# Allegro board divider.brd
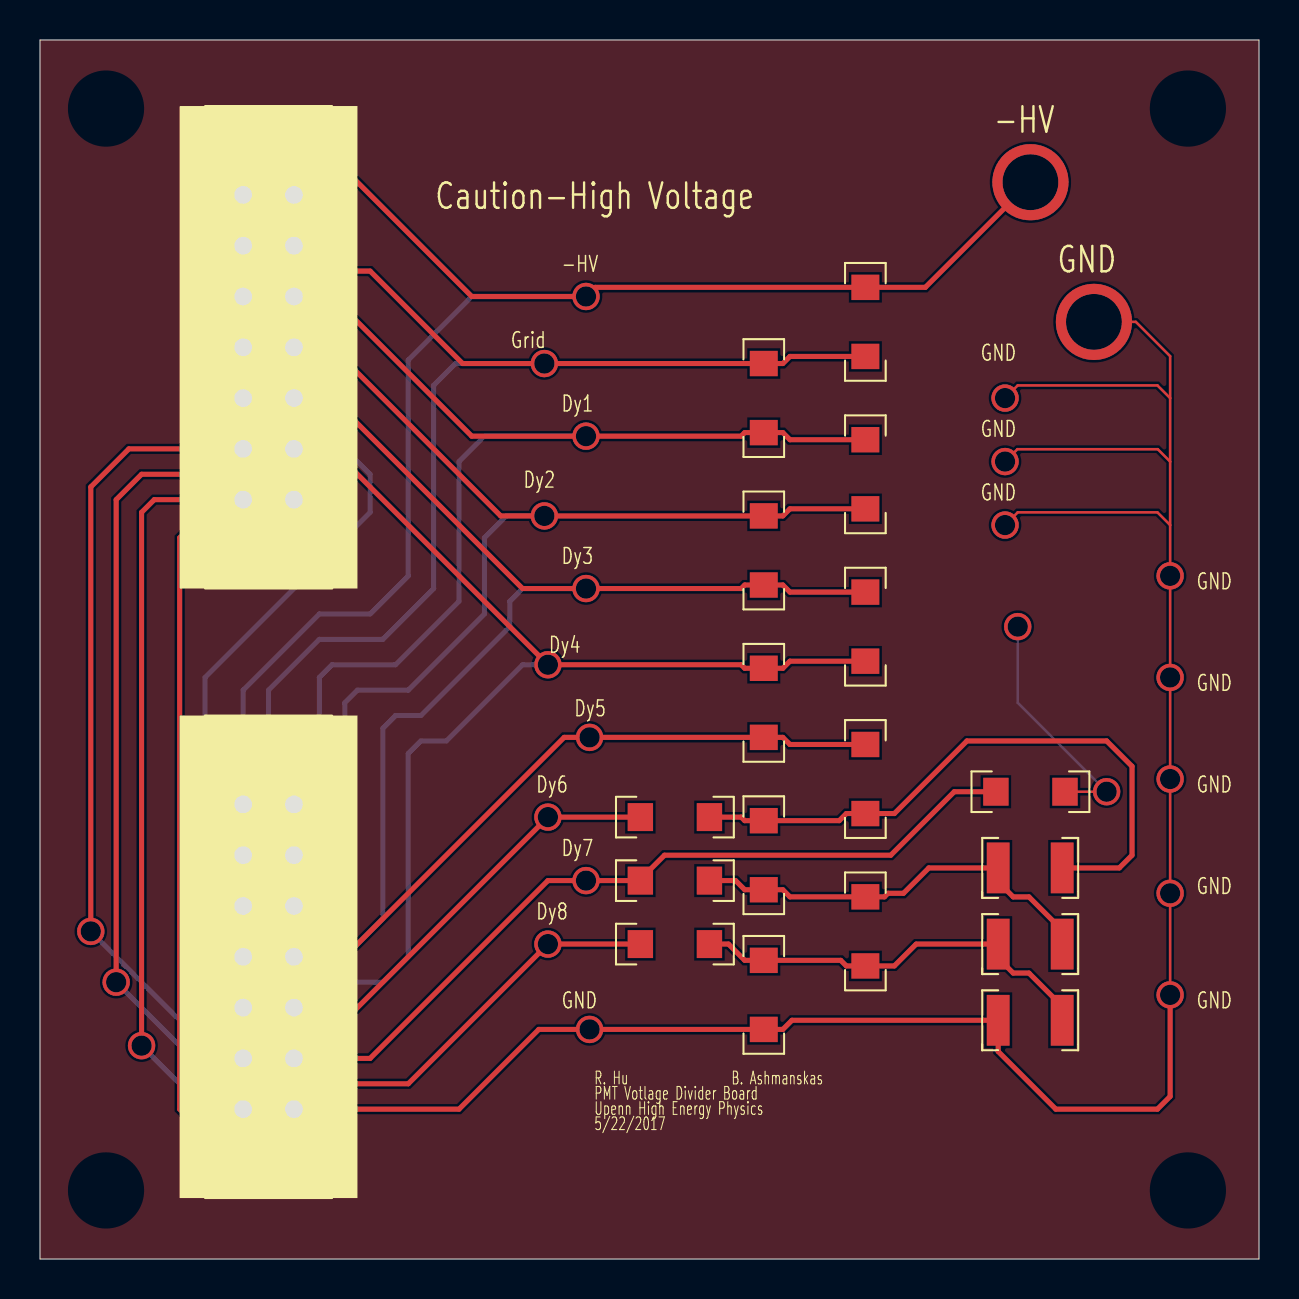
[diagram p0: board, top side]
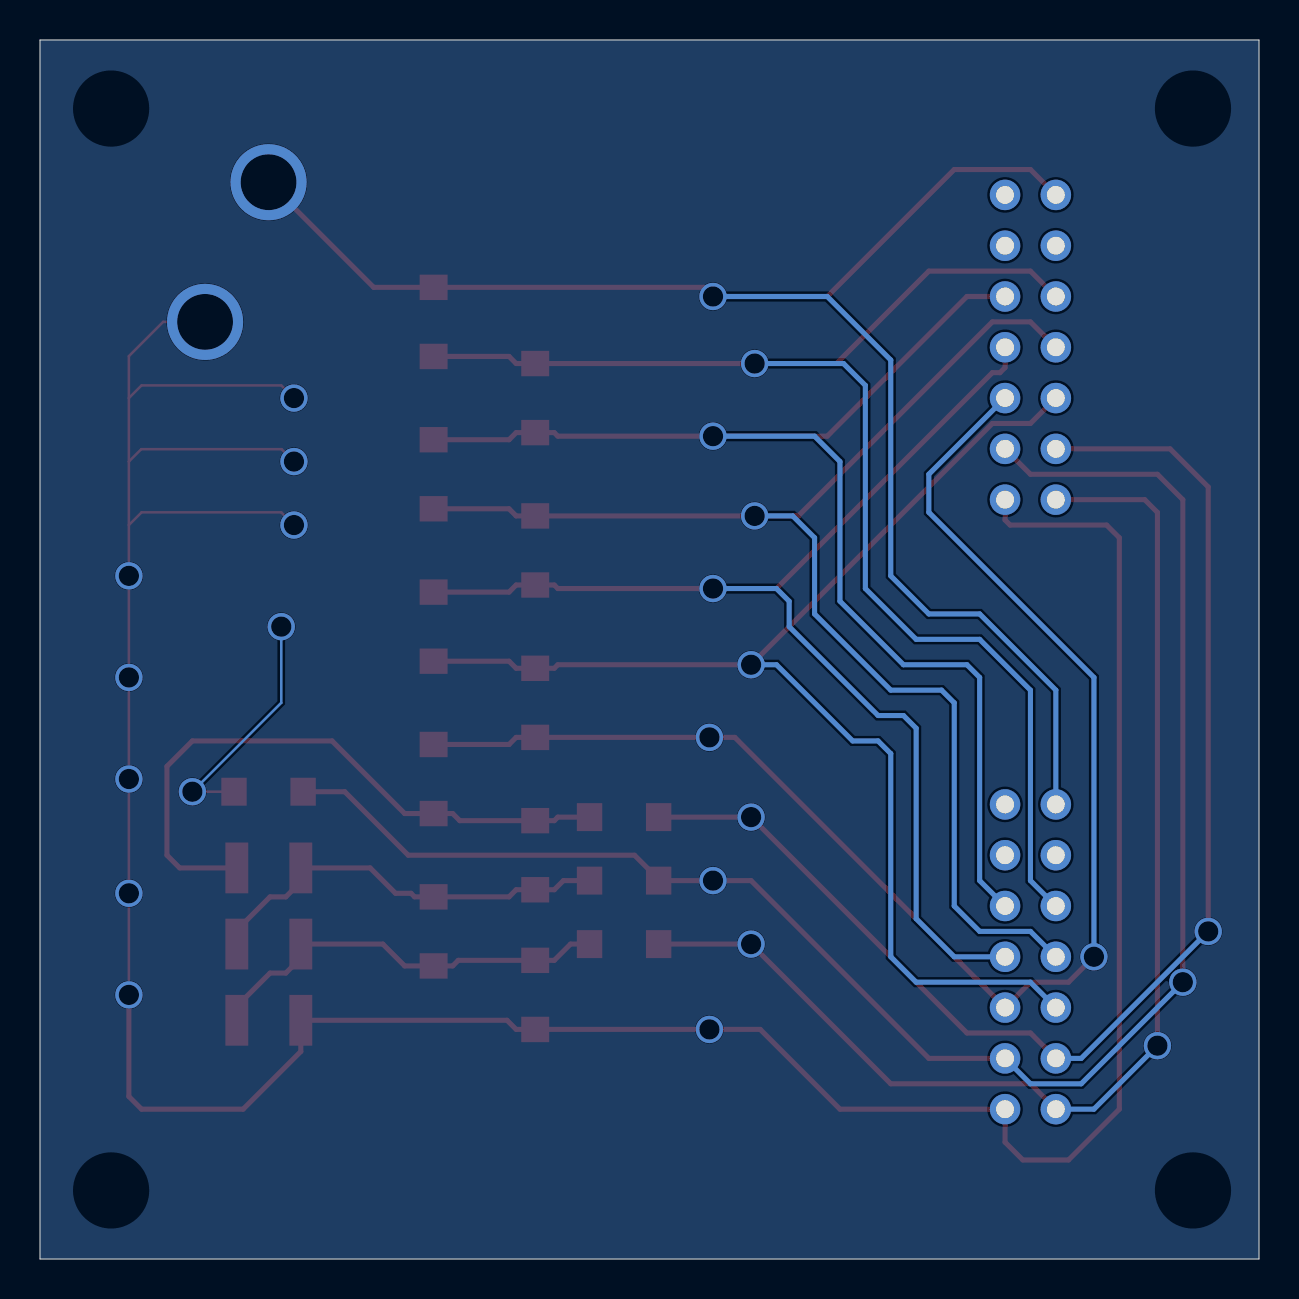
[diagram p1: board, bottom side, seen from below]

Outline 60.96 x 60.96 mm; copper layers: TOP, BOTTOM. Coordinates in mm from the lower left corner of the outline.
Outline path: 0,60.96 60.96,60.96 60.96,0 0,0 0,60.96

## Placement (name value [footprint] x y rotation side)
C1  0.022UF  [C1210]  49.53 19.56 180 top
C2  0.022UF  [C1210]  49.53 15.75 180 top
C3  0.022UF  [C1210]  49.53 11.94 180 top
J1  -  [HDR14]  11.43 45.59 0 top
J2  -  [HDR14]  11.43 15.11 0 top
R1  390K  [R1206]  41.28 46.86 270 top
R2  1.44M  [R1206]  36.2 43.05 270 top
R3  1M  [R1206]  49.53 23.37 180 top
R4  450K  [R1206]  41.28 39.24 270 top
R5  450K  [R1206]  36.2 35.43 270 top
R6  300K  [R1206]  41.28 31.62 270 top
R7  300K  [R1206]  36.2 27.81 270 top
R8  300K  [R1206]  41.28 24 270 top
R9  51  [R1206]  31.75 22.1 180 top
R10  300K  [R1206]  36.2 20.19 270 top
R11  51  [R1206]  31.75 18.92 180 top
R12  300K  [R1206]  41.28 16.38 270 top
R13  51  [R1206]  31.75 15.75 180 top
R14  300K  [R1206]  36.2 13.21 270 top

## Library data of the parts
C1-C3 = CSMD1210: alternate symbols: (C1206); part number: CSMD1210-0.022UF,20%,1210,2KV
J1 J2 = CONN14
R1 = RSMD1206: part number: RSMD1206-390K,5%,1206
R2 = RSMD1206: part number: RSMD1206-1.44M,5%,1206
R3 = RSMD1206: part number: RSMD1206-1M,5%,1206
R4 R5 = RSMD1206: part number: RSMD1206-450K,5%,1206
R6-R8 R10 R12 R14 = RSMD1206: part number: RSMD1206-300K,5%,1206
R9 R11 R13 = RSMD1206: part number: RSMD1206-51,5%,1206

## Footprints (pads in the part's own frame, mm; a bottom-side part is the same pattern mirrored in y, then rotated)
C1210
  rect 1.143x2.54 smd: 1(-1.587,0) 2(1.612,0)
HDR14
  round 1.524 hole 0.889: 1(-1.27,7.62) 2(1.27,7.62) 3(-1.27,5.08) 4(1.27,5.08) 5(-1.27,2.54) 6(1.27,2.54) 7(-1.27,0) 8(1.27,0) 9(-1.27,-2.54) 10(1.27,-2.54) 11(-1.27,-5.08) 12(1.27,-5.08) 13(-1.27,-7.62) 14(1.27,-7.62)
R1206
  rect 1.27x1.397 smd: 1(-1.727,0) 2(1.727,0)

## Nets
GND: C3.2(B<0>) J1.14 J2.14 R14.2(B<0>)
-HV: J1.1 J2.1 R1.1(A<0>)
ACC: R3.1(A<0>)
UNNAMED_1_CONN14_I18_5: J1.5 J2.5 R1.2(B<0>) R2.1(A<0>)
UNNAMED_1_CONN14_I18_6: J1.6 J2.6 R2.2(B<0>) R4.1(A<0>)
UNNAMED_1_CONN14_I18_7: J1.7 J2.7 R4.2(B<0>) R5.1(A<0>)
UNNAMED_1_CONN14_I18_8: J1.8 J2.8 R5.2(B<0>) R6.1(A<0>)
UNNAMED_1_CONN14_I18_9: J1.9 J2.9 R6.2(B<0>) R7.1(A<0>)
UNNAMED_1_CONN14_I18_10: J1.10 J2.10 R7.2(B<0>) R8.1(A<0>)
UNNAMED_1_CONN14_I18_11: J1.11 J2.11 R9.2(B<0>)
UNNAMED_1_CONN14_I18_12: J1.12 J2.12 R3.2(B<0>) R11.2(B<0>)
UNNAMED_1_CONN14_I18_13: J1.13 J2.13 R13.2(B<0>)
UNNAMED_1_CSMD1210_I15_A: C1.1(A<0>) R8.2(B<0>) R9.1(A<0>) R10.1(A<0>)
UNNAMED_1_CSMD1210_I15_B: C1.2(B<0>) C2.1(A<0>) R10.2(B<0>) R11.1(A<0>) R12.1(A<0>)
UNNAMED_1_CSMD1210_I16_A: C2.2(B<0>) C3.1(A<0>) R12.2(B<0>) R13.1(A<0>) R14.1(A<0>)

Pads without a net: J1 2 3 4; J2 2 3 4

## Via types
v1: diameter 1.372, hole 1.016, TOP to BOTTOM, 25 vias
v2: diameter 3.81, hole 2.794, TOP to BOTTOM, 2 vias

## Routing (per net, layer and track width the routed paths; a pad name or vN(x,y) marks a point on that pad's centre or on a via; arc(x,y) is an arc through that point)
GND: length 161
  TOP w0.127: v1(48.26,36.7) 48.9,37.34 55.88,37.34 56.52,36.7 ; v1(48.26,43.05) 48.9,43.69 55.88,43.69 56.52,43.05 ; 56.52,43.05 56.52,39.88 ; 56.52,43.05 56.52,45.15 54.8,46.86 v2(52.71,46.86) ; 56.52,39.88 55.9,40.5 48.88,40.5 v1(48.26,39.88) ; 56.52,39.88 56.52,36.7 ; 56.52,36.7 v1(56.52,34.16) v1(56.52,29.08) v1(56.52,24) v1(56.52,18.29) v1(56.52,13.21)
  TOP w0.254: v1(56.52,13.21) 56.52,8.13 55.88,7.49 50.8,7.49 47.92,10.38 C3.2 37.6,11.94 37.15,11.48 R14.2 v1(27.48,11.48) 24.94,11.48 20.96,7.49 J2.14 12.7,5.84 11.81,4.95 9.53,4.95 6.98,7.49 6.98,36.07 7.62,36.7 12.45,36.7 12.7,36.96 J1.14
-HV: length 82.2
  TOP w0.254: J1.1 11.43,54.48 15.24,54.48 21.59,48.13 v1(27.31,48.13) 27.76,48.59 R1.1 44.27,48.59 v2(49.53,53.85)
  BOTTOM w0.254: v1(27.31,48.13) 21.59,48.13 18.41,44.96 18.41,34.16 16.51,32.26 13.97,32.26 10.16,28.45 J2.1
ACC: length 12.2
  TOP w0.127: R3.1 v1(53.34,23.37)
  BOTTOM w0.127: v1(48.9,31.62) 48.9,27.81 v1(53.34,23.37)
UNNAMED_1_CONN14_I18_5: length 71.5
  TOP w0.254: R1.2 37.5,45.14 37.15,44.78 R2.1 v1(25.22,44.78) 21.13,44.78 16.51,49.4 11.43,49.4 J1.5
  BOTTOM w0.254: J2.5 11.43,18.92 11.43,28.45 13.97,30.99 17.15,30.99 19.69,33.53 19.69,43.69 20.78,44.78 v1(25.22,44.78)
UNNAMED_1_CONN14_I18_6: length 66.1
  TOP w0.254: R4.1 37.5,40.97 37.15,41.33 R2.2 35.24,41.33 35.06,41.15 v1(27.31,41.15) 21.59,41.15 14.6,48.13 J1.6
  BOTTOM w0.254: J2.6 13.97,18.92 13.97,29.08 14.6,29.72 17.78,29.72 20.96,32.89 20.96,39.88 22.22,41.15 v1(27.31,41.15)
UNNAMED_1_CONN14_I18_7: length 68.2
  TOP w0.254: J1.7 11.43,46.86 13.34,46.86 23.04,37.16 v1(25.22,37.16) R5.1 37.15,37.16 37.5,37.52 R4.2
  BOTTOM w0.254: v1(25.22,37.16) 23.32,37.16 22.22,36.07 22.22,32.26 18.41,28.45 15.88,28.45 15.24,27.81 15.24,17.65 13.97,16.38 11.43,16.38 J2.7
UNNAMED_1_CONN14_I18_8: length 62.9
  TOP w0.254: J1.8 12.7,44.58 12.95,44.32 13.34,44.32 24.13,33.53 v1(27.31,33.53) 35.06,33.53 35.24,33.71 R5.2 37.15,33.71 37.5,33.35 R6.1
  BOTTOM w0.254: J2.8 15.24,15.11 17.15,17.02 17.15,26.54 17.78,27.18 19.05,27.18 23.5,31.62 23.5,32.89 24.13,33.53 v1(27.31,33.53)
UNNAMED_1_CONN14_I18_9: length 65.2
  TOP w0.254: R6.2 37.5,29.9 37.15,29.54 R7.1 35.24,29.54 35.06,29.72 v1(25.4,29.72) 13.34,41.78 11.43,41.78 J1.9
  BOTTOM w0.254: v1(25.4,29.72) 24.13,29.72 20.32,25.91 19.05,25.91 18.41,25.27 18.41,15.11 17.15,13.84 11.43,13.84 J2.9
UNNAMED_1_CONN14_I18_10: length 72.8
  TOP w0.254: v1(8.26,15.11) 9.53,13.84 11.43,13.84 J2.10 26.21,26.09 v1(27.48,26.09) R7.2 37.15,26.09 37.5,25.73 R8.1
  BOTTOM w0.254: v1(8.26,15.11) 8.26,29.08 16.51,37.34 16.51,39.24 J1.10
UNNAMED_1_CONN14_I18_11: length 65.7
  TOP w0.254: J1.11 4.45,40.51 2.54,38.61 v1(2.54,16.38) ; J2.11 11.43,11.3 14.6,11.3 v1(25.4,22.1) R9.2
  BOTTOM w0.254: v1(2.54,16.38) 8.89,10.03 J2.11
UNNAMED_1_CONN14_I18_12: length 86.3
  TOP w0.254: v1(3.81,13.84) 3.81,37.97 5.08,39.24 11.43,39.24 J1.12 ; R3.2 45.72,23.37 42.54,20.19 31.23,20.19 30.02,18.99 R11.2 v1(27.31,18.92) 25.4,18.92 16.51,10.03 J2.12
  BOTTOM w0.254: v1(3.81,13.84) 8.89,8.76 11.43,8.76 J2.12
UNNAMED_1_CONN14_I18_13: length 61.7
  TOP w0.254: J1.13 5.72,37.97 5.08,37.34 v1(5.08,10.67) ; R13.2 v1(25.4,15.75) 18.41,8.76 11.43,8.76 J2.13
  BOTTOM w0.254: J2.13 8.26,7.49 v1(5.08,10.67)
UNNAMED_1_CSMD1210_I15_A: length 31.6
  TOP w0.254: C1.1 53.97,19.56 54.61,20.19 54.61,24.64 53.34,25.91 46.35,25.91 42.72,22.28 R8.2 40.32,22.28 39.97,21.92 R10.1 35.24,21.92 35.06,22.1 R9.1
UNNAMED_1_CSMD1210_I15_B: length 21
  TOP w0.254: C2.1 51.12,16.45 49.46,18.11 48.67,18.11 47.92,18.86 C1.2 44.45,19.56 43.18,18.29 42.41,18.29 42.23,18.11 R12.1 37.5,18.11 37.15,18.47 R10.2 35.24,18.47 34.79,18.92 R11.1
UNNAMED_1_CSMD1210_I16_A: length 20.9
  TOP w0.254: R13.1 34.43,15.75 35.24,14.94 R14.1 40.04,14.94 40.32,14.66 R12.2 42.72,14.66 43.82,15.75 C2.2 47.92,15.05 48.67,14.3 49.46,14.3 51.12,12.64 C3.1

## Copper pours and planes (outline as drawn; the poured copper is in the pictures)
Net_1 on BOTTOM: 60.96,0 60.96,60.96 0,60.96 0,0 ; 4 cut-outs
Net_2 on TOP: 0,60.96 0,0 60.96,0 60.96,60.96 ; 4 cut-outs

## Text on the board
Ref Des/Silkscreen Top: R. Hu | PMT Votlage Divider Board | Upenn High Energy Physics | 5/22/2017 | B. Ashmanskas | Grid | Dy2 | Dy6 | Dy8 | Dy4 | -HV | Dy1 | Dy3 | Dy7 | GND | Dy5 | Acc | Caution-High Voltage
